# Altium PCB PCB1.PcbDoc
Units mm, origin at the board's own origin, x right, y up, seen from the top; angles counter-clockwise.
Board outline 94.23 x 99.72 mm, 2 copper layers (Top Layer, Bottom Layer); 89 components, 82 nets, 252 pads, 59 vias.
Unrouted connection lines stored in the file: 127.
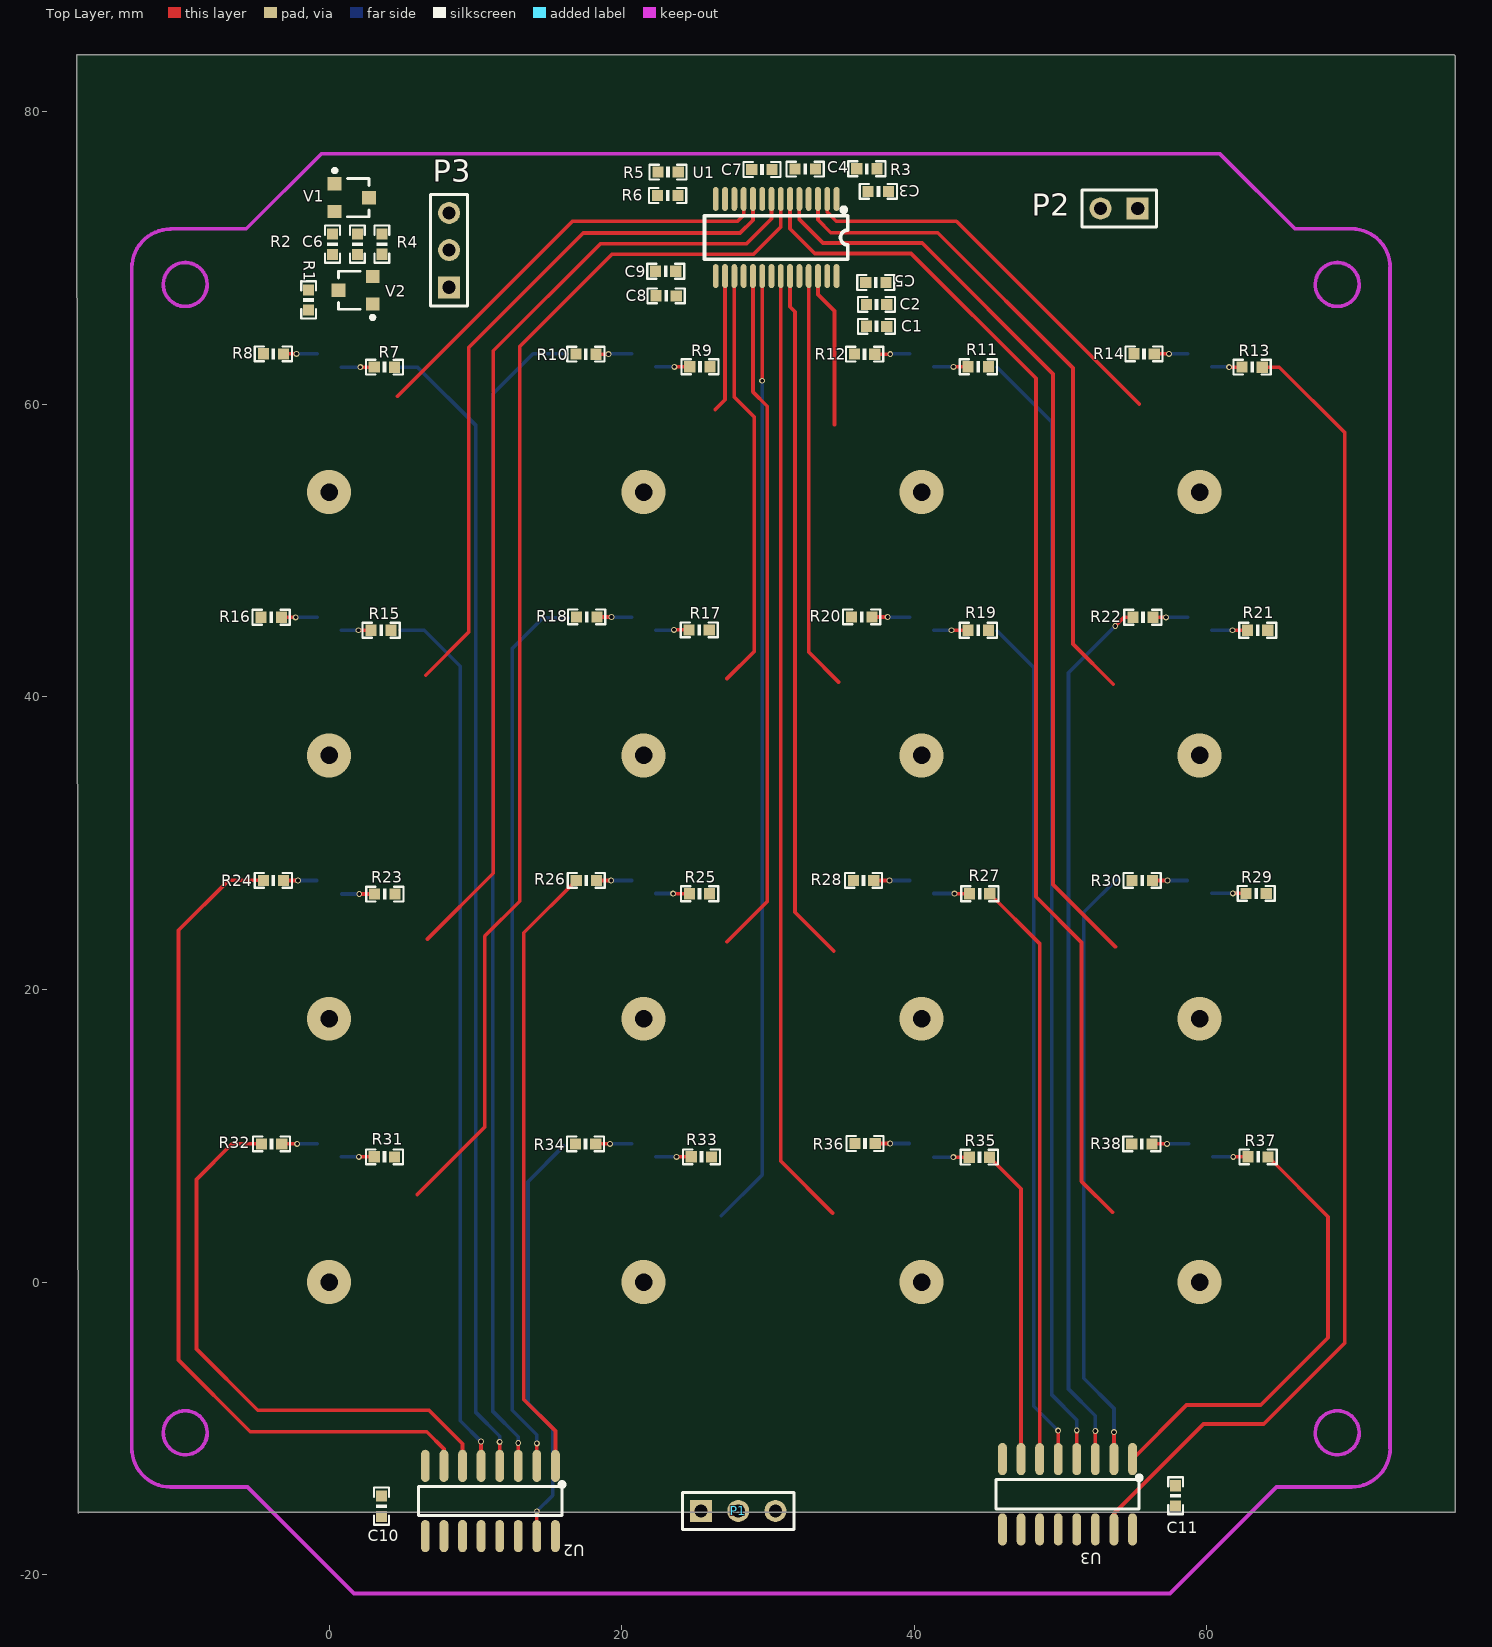
[diagram p0: Top Layer view]
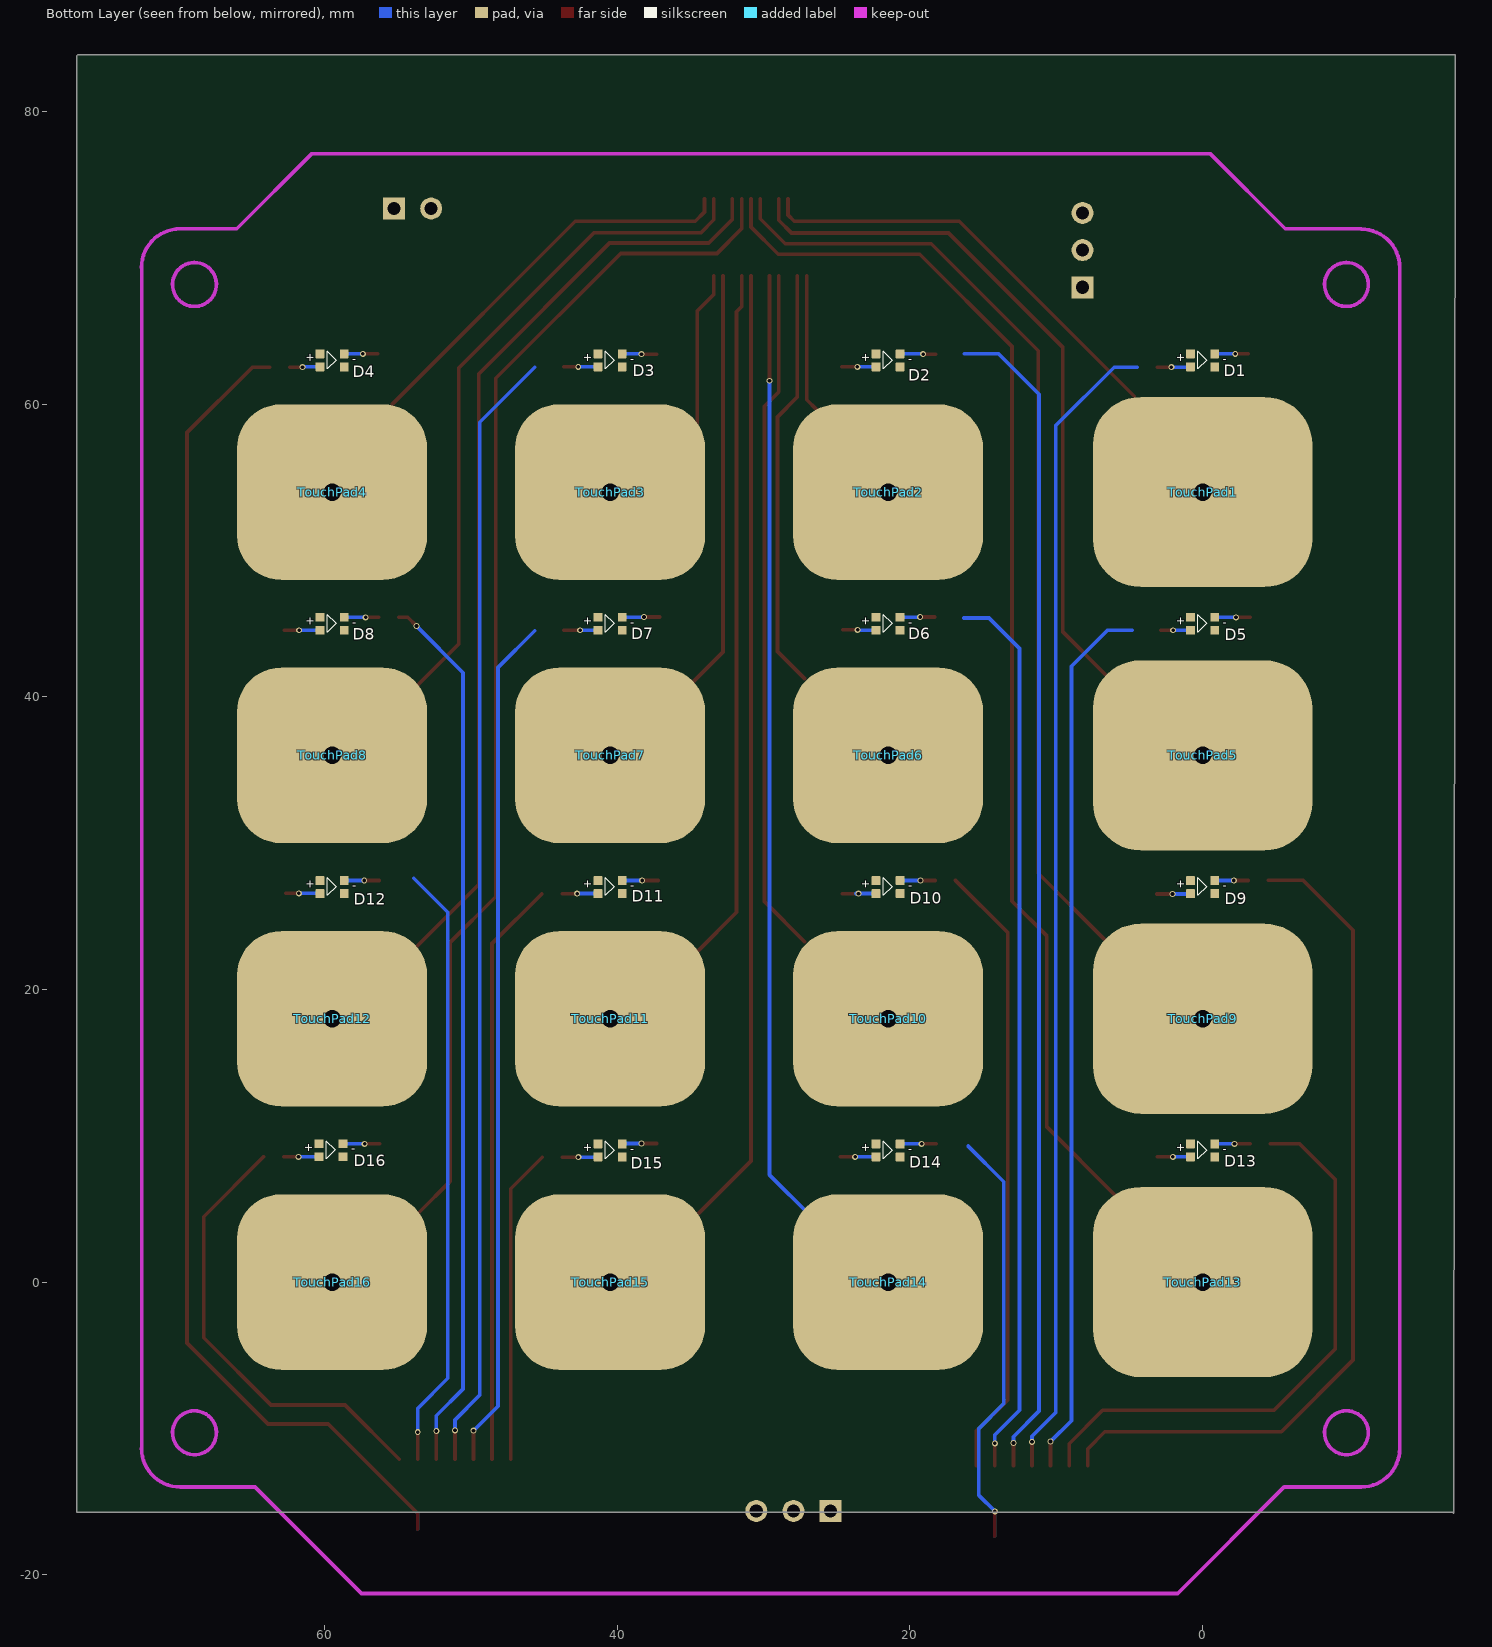
[diagram p1: Bottom Layer view, seen from below]

## Layer stack, top to bottom
Top Layer: signal copper 0.0356
Dielectric: dielectric 0.32, FR-4, Dk 4.8
Bottom Layer: signal copper 0.0356

## Board outline
-17.163,-15.815 -17.087,-15.738 76.969,-15.738 76.969,83.804 76.868,83.906 -17.265,83.906

## Design rules (kind name [scope] priority, off if disabled: settings)
Clearance [All] p1: gap=0.127
MinimumSolderMaskSliver [All] p1: minsoldermaskwidth=0
PolygonConnect [All] p1: connectstyle=Relief reliefconductorwidth=0.254 reliefentries=4 polygonreliefangle="90 Angle"
RoutingVias [All] p1: holewidth=0.711 width=1.27 viastyle="Through Hole" minholewidth=0.711 minwidth=1.27 maxholewidth=0.711 maxwidth=1.27
SilkToSilkClearance [All] p1: silktosilkclearance=0
SilkscreenOverComponentPads [IsPad] p1: minsilkscreentomaskgap=0
SolderMaskExpansion [All] p1: expansion=0.102
Width [All] p1: maxlimit=1.27 minlimit=0.254 preferedwidth=0.254
25 further rules are at their usual default settings.

## Components (designator, comment, footprint, x,y, rotation, side; value= is the part's Value field where it differs from the comment)
C1 "102" 0603p 37.414,65.329 r0 top
C2 "104" 0603p 37.414,66.827 r0 top
C3 "15pF" 0603p 37.541,74.549 r180 top
C4 "15pF" 0603p 32.537,76.073 r0 top
C5 "22pF" 0603p 37.363,68.326 r0 top
C6 "1u" 0603p 1.932,70.942 r270 top
C7 "22pF" 0603p 29.591,76.048 r180 top
C8 "22pF" 0603p 23.038,67.412 r180 top
C9 "15pF" 0603p 23.012,69.088 r180 top
C10 "104" 0603p 3.581,-15.316 r270 top
C11 "104" 0603p 57.861,-14.605 r270 top
D1 "2xLED" LED 0,63 r90 bottom
D2 "2xLED" LED 21.5,63 r90 bottom
D3 "2xLED" LED 40.5,63 r90 bottom
D4 "2xLED" LED 59.5,63 r90 bottom
D5 "2xLED" LED 0,45 r90 bottom
D6 "2xLED" LED 21.5,45 r90 bottom
D7 "2xLED" LED 40.5,45 r90 bottom
D8 "2xLED" LED 59.5,45 r90 bottom
D9 "2xLED" LED 0,27 r90 bottom
D10 "2xLED" LED 21.5,27 r90 bottom
D11 "2xLED" LED 40.5,27 r90 bottom
D12 "2xLED" LED 59.5,27 r90 bottom
D13 "2xLED" LED 0,9 r90 bottom
D14 "2xLED" LED 21.5,9 r90 bottom
D15 "2xLED" LED 40.5,9 r90 bottom
D16 "2xLED" LED 59.576,9.017 r90 bottom
P1 "Header 3" HDR1X3 25.425,-15.646 r0 top
P2 "Header 2" HDR1X2 55.27,73.381 r180 top
P3 "Header 3" HDR1X3 8.204,67.996 r90 top
R1 "10k" 0603p -1.397,67.132 r270 top
R2 "470R" 0603p 0.23,70.942 r270 top
R3 "1M" 0603p 36.754,76.098 r0 top
R4 "470R" 0603p 3.608,70.942 r90 top
R5 "10K" 0603p 23.165,75.87 r0 top
R6 "10K" 0603p 23.139,74.27 r0 top
R7 "150R" 0603p 3.785,62.535 r180 top
R8 "150R" 0603p -3.81,63.449 r0 top
R9 "150R" 0603p 25.349,62.56 r180 top
R10 "150R" 0603p 17.551,63.424 r0 top
R11 "150R" 0603p 44.374,62.56 r180 top
R12 "150R" 0603p 36.601,63.424 r0 top
R13 "150R" 0603p 63.094,62.535 r180 top
R14 "150R" 0603p 55.702,63.449 r0 top
R15 "150R" 0603p 3.556,44.552 r180 top
R16 "150R" 0603p -3.962,45.441 r0 top
R17 "150R" 0603p 25.298,44.577 r180 top
R18 "150R" 0603p 17.602,45.466 r0 top
R19 "150R" 0603p 44.374,44.552 r180 top
R20 "150R" 0603p 36.398,45.466 r0 top
R21 "150R" 0603p 63.475,44.552 r180 top
R22 "150R" 0603p 55.626,45.441 r0 top
R23 "150R" 0603p 3.81,26.518 r180 top
R24 "150R" 0603p -3.81,27.457 r0 top
R25 "150R" 0603p 25.324,26.543 r180 top
R26 "150R" 0603p 17.577,27.457 r0 top
R27 "150R" 0603p 44.475,26.543 r180 top
R28 "150R" 0603p 36.525,27.457 r0 top
R29 "150R" 0603p 63.373,26.568 r180 top
R30 "150R" 0603p 55.575,27.457 r0 top
R31 "150R" 0603p 3.785,8.56 r180 top
R32 "150R" 0603p -3.937,9.449 r0 top
R33 "150R" 0603p 25.451,8.56 r180 top
R34 "150R" 0603p 17.526,9.449 r0 top
R35 "150R" 0603p 44.45,8.534 r180 top
R36 "150R" 0603p 36.627,9.474 r0 top
R37 "150R" 0603p 63.5,8.56 r180 top
R38 "150R" 0603p 55.55,9.449 r0 top
TouchPad1 "TouchPad" TOUCHKEYBIG 0,54 r0 top
TouchPad2 "TouchPad" TOUCHKEY 21.5,54 r0 top
TouchPad3 "TouchPad" TOUCHKEY 40.5,54 r0 top
TouchPad4 "TouchPad" TOUCHKEY 59.5,54 r0 top
TouchPad5 "TouchPad" TOUCHKEYBIG 0,36 r0 top
TouchPad6 "TouchPad" TOUCHKEY 21.5,36 r0 top
TouchPad7 "TouchPad" TOUCHKEY 40.5,36 r0 top
TouchPad8 "TouchPad" TOUCHKEY 59.5,36 r180 top
TouchPad9 "TouchPad" TOUCHKEYBIG 0,18 r0 top
TouchPad10 "TouchPad" TOUCHKEY 21.5,18 r180 top
TouchPad11 "TouchPad" TOUCHKEY 40.5,18 r0 top
TouchPad12 "TouchPad" TOUCHKEY 59.5,18 r180 top
TouchPad13 "TouchPad" TOUCHKEYBIG 0,0 r180 top
TouchPad14 "TouchPad" TOUCHKEY 21.5,0 r180 top
TouchPad15 "TouchPad" TOUCHKEY 40.5,0 r180 top
TouchPad16 "TouchPad" TOUCHKEY 59.5,0 r180 top
U1 "TTP229-L" LC-SSOP-28_150MIL 30.556,71.399 r180 top
U2 "74HC595" LC-SOP-16_150MIL 11.024,-14.961 r180 top
U3 "74HC595" LC-SOP-16_150MIL 50.47,-14.503 r180 top
V1 "8550(SOT23)" SOT-23R 1.424,74.117 r270 top
V2 "8050(SOT23)" SOT-23R 1.932,67.793 r90 top

## Footprints (in the part's own frame and the unit in brackets; to place one, negate y for a bottom-side part, rotate by r counter-clockwise, add the part's x,y. Pads: shape width x height; smd on the part's side, far side on the other; paste and mask are expansions set on the pad)
0603p [mil]
  rect 30x30 smd: 1(-27,0) 2(27.5,-0.06)
  silkscreen extent -50,-20 50,20
HDR1X2 [mm] "Connector; Header; 2 Position"
  rect 1.5x1.5 hole 0.9: 1(0,0)
  round 1.5 hole 0.9: 2(2.54,0)
  silkscreen extent -1.27,-1.27 3.81,1.27
HDR1X3 [mm] "Connector; Header; 3 Position"
  rect 1.5x1.5 hole 0.9: 1(0,0)
  round 1.5 hole 0.9: 2(2.54,0) 3(5.08,0)
  silkscreen extent -1.27,-1.27 6.35,1.27
LC-SOP-16_150MIL [mm]
  oval 0.6x2.2 smd: 1(-4.445,-2.4) 2(-3.175,-2.4) 3(-1.905,-2.4) 4(-0.635,-2.4) 5(0.635,-2.4) 6(1.905,-2.4) 7(3.175,-2.4) 8(4.445,-2.4) 9(4.445,2.4) 10(3.175,2.4) 11(1.905,2.4) 12(0.635,2.4) 13(-0.635,2.4) 14(-1.905,2.4) 15(-3.175,2.4) 16(-4.445,2.4)
  silkscreen extent -5.05,-1.27 4.9,1
LC-SSOP-28_150MIL [mm]
  oval 0.4x1.63 smd mask+0.051: 1(-4.127,-2.635) 2(-3.492,-2.635) 3(-2.857,-2.635) 4(-2.222,-2.635) 5(-1.587,-2.635) 6(-0.952,-2.635) 7(-0.317,-2.635) 8(0.318,-2.635) 9(0.953,-2.635) 10(1.588,-2.635) 11(2.223,-2.635) 12(2.858,-2.635) 13(3.493,-2.635) 14(4.128,-2.635) 15(4.128,2.635) 16(3.493,2.635) 17(2.858,2.635) 18(2.223,2.635) 19(1.588,2.635) 20(0.953,2.635) 21(0.318,2.635) 22(-0.317,2.635) 23(-0.952,2.635) 24(-1.587,2.635) 25(-2.222,2.635) 26(-2.857,2.635) 27(-3.492,2.635) 28(-4.127,2.635)
  silkscreen extent -4.9,-2.05 4.9,1.48
LED [mm]
  rrect10% 0.6x0.6 smd: 1(0.445,0.826) 2(-0.444,0.826) 3(0.444,-0.826) 4(-0.445,-0.826)
  silkscreen extent -0.57,-0.28 0.62,0.32
SOT-23R [mm]
  rect 0.9x0.95 smd: 1(0.95,-1.048) 2(-0.95,-1.048) 3(0,1.302)
  silkscreen extent -1.98,-1.17 1.3,1.3
TOUCHKEY [mm]
  rrect50% 13x12 smd far side: 1(0,0)
TOUCHKEYBIG [mm]
  rrect50% 15x13 smd far side: 1(0,0)

## Part data
C1 C2 C6 C10 C11: library part 电容-NPO-0603, "0603/NPO"
C3 C4 C5 C7 C8 C9: library part Cap, "Capacitor"
P1 P3: "Header, 3-Pin"
P2: "Header, 2-Pin"
R1 R2 R3 R4 R7 R8 R9 R10 R11 R12 R13 R14 R15 R16 R17 R18 R19 R20 R21 R22 R23 R24 R25 R26 R27 R28 R29 R30 R31 R32 R33 R34 R35 R36 R37 R38: library part 电阻-0603, "0603/0.1000w/75v"
R5 R6: library part Res2, "Resistor"
U2 U3: library part 74HCT595

## Via types
v1: diameter 0.406, hole 0.254, Top Layer to Bottom Layer, 43 vias
v2: diameter 3, hole 1.2, Top Layer to Bottom Layer, 16 vias

## Nets (pads, with @x,y where several pads share a name; then routed paths per layer and width w, separated by ;. In a path a pad name is that pad's centre, name@x,y a point inside that pad or via, vN(x,y) a via of type N, cw(c..) or ccw(c..) an arc to the next point about the centre after c; other vN are vias at no path point)
595_CLK: P1.3 U2.11 U3.11
595_DAT: P1.1 U2.14
595_ST: P1.2 U2.12 U3.12
+3.3: C1.1 C2.1 C10.1 C11.1 D1.1 D2.1 D3.1 D4.1 D5.1 D6.1 D7.1 D8.1 D9.1 D10.1 D11.1 D12.1 D13.1 D14.1 D15.1 D16.1 P2.1 R1.2 R5.1 R6.1 U1.27 U2.10 U2.16 U3.10 U3.16 V1.2
GND: C1.2 C2.2 C3.1 C4.1 C5.2 C6.2 C7.1 C8.2 C9.2 C10.2 C11.2 D1.4 D2.4 D3.4 D4.4 D5.4 D6.4 D7.4 D8.4 D9.4 D10.4 D11.4 D12.4 D13.4 D14.4 D15.4 D16.4 P2.2 R3.2 U1.21 U1.28 U2.8 U2.13 U3.8 U3.13 V2.2
KYSEL: R3.1 TouchPad8.1 U1.3 | length 45.8
  Top Layer w0.254: U1.3 33.414,72.606 34.29,71.73 41.605,71.73 50.851,62.484 50.851,43.612 53.594,40.869
  other v2: 59.5,36
LED1_G: D1.3 R8.2 | length 2.3
  Top Layer w0.254: R8.2 v1(-2.234,63.448)
  Bottom Layer w0.254: v1(-2.234,63.448) D1.3@-0.829,63.448
LED1_R: D1.2 R7.2 | length 2.2
  Top Layer w0.254: v1(2.135,62.536) R7.2
  Bottom Layer w0.254: D1.2@0.845,62.536 v1(2.135,62.536)
LED2_G: D2.3 R10.2 | length 2.4
  Top Layer w0.254: R10.2 v1(19.102,63.422)
  Bottom Layer w0.254: v1@19.125,63.445 D2.3
LED2_R: D2.2 R9.2 | length 2.3
  Top Layer w0.254: v1(23.598,62.562) R9.2
  Bottom Layer w0.254: D2.2 v1@23.592,62.556
LED3_G: D3.3 R12.2 | length 2.4
  Top Layer w0.254: R12.2 v1(38.356,63.422)
  Bottom Layer w0.254: v1@38.378,63.445 D3.3
LED3_R: D3.2 R11.2 | length 2.3
  Top Layer w0.254: v1(42.674,62.562) R11.2
  Bottom Layer w0.254: D3.2 v1@42.667,62.556
LED4_G: D4.3 R14.2 | length 2.3
  Top Layer w0.254: R14.2 v1(57.402,63.448)
  Bottom Layer w0.254: v1@57.405,63.445 D4.3
LED4_R: D4.2 R13.2 | length 2.1
  Top Layer w0.254: v1(61.52,62.536) R13.2
  Bottom Layer w0.254: D4.2 v1@61.501,62.556
LED5_G: D5.3 R16.2 | length 2.4
  Top Layer w0.254: R16.2 v1(-2.284,45.439)
  Bottom Layer w0.254: v1(-2.284,45.439) D5.3@-0.831,45.439
LED5_R: D5.2 R15.2 | length 2
  Top Layer w0.254: v1(2.008,44.553) R15.2
  Bottom Layer w0.254: D5.2@0.828,44.553 v1(2.008,44.553)
LED6_G: D6.3 R18.2 | length 2.4
  Top Layer w0.254: R18.2 v1(19.306,45.464)
  Bottom Layer w0.254: v1@19.326,45.444 D6.3
LED6_R: D6.2 R17.2 | length 2.3
  Top Layer w0.254: v1(23.573,44.579) R17.2
  Bottom Layer w0.254: D6.2 v1@23.55,44.555
LED7_G: D7.3 R20.2 | length 2.6
  Top Layer w0.254: R20.2 v1(38.178,45.464)
  Bottom Layer w0.254: v1@38.198,45.444 D7.3
LED7_R: D7.2 R19.2 | length 2.3
  Top Layer w0.254: v1(42.543,44.553) R19.2
  Bottom Layer w0.254: D7.2 v1@42.541,44.555
LED8_G: D8.3 R22.2 | length 2.3
  Top Layer w0.254: R22.2 v1(57.202,45.439)
  Bottom Layer w0.254: v1@57.208,45.444 D8.3
LED8_R: D8.2 R21.2 | length 2.5
  Top Layer w0.254: v1(61.749,44.553) R21.2
  Bottom Layer w0.254: D8.2@60.328,44.553 D8.2 v1@61.747,44.555
LED9_G: D9.3 R24.2 | length 2.3
  Top Layer w0.254: R24.2 v1(-2.132,27.456)
  Bottom Layer w0.254: v1(-2.132,27.456) D9.3@-0.837,27.456
LED9_R: D9.2 R23.2 | length 2.2
  Top Layer w0.254: v1(2.059,26.519) R23.2
  Bottom Layer w0.254: D9.2@0.862,26.519 v1(2.059,26.519)
LED10_G: D10.3 R26.2 | length 2.4
  Top Layer w0.254: R26.2 v1(19.28,27.456)
  Bottom Layer w0.254: v1@19.292,27.444 D10.3
LED10_R: D10.2 R25.2 | length 2.5
  Top Layer w0.254: v1(23.519,26.545) R25.2
  Bottom Layer w0.254: D10.2 v1@23.713,26.555
LED11_G: D11.3 R28.2 | length 2.4
  Top Layer w0.254: R28.2 v1(38.305,27.456)
  Bottom Layer w0.254: v1@38.316,27.444 D11.3
LED11_R: D11.2 R27.2 | length 2.4
  Top Layer w0.254: v1(42.75,26.545) R27.2
  Bottom Layer w0.254: D11.2 v1@42.739,26.555
LED12_G: D12.3 R30.2 | length 2.4
  Top Layer w0.254: R30.2 v1(57.301,27.456)
  Bottom Layer w0.254: v1(57.301,27.456) D12.3@58.663,27.456
LED12_R: D12.2 R29.2 | length 2.3
  Top Layer w0.254: v1(61.774,26.57) R29.2
  Bottom Layer w0.254: D12.2@60.34,26.57 v1(61.774,26.57)
LED13_G: D13.3 R32.2 | length 2.4
  Top Layer w0.254: R32.2 v1(-2.186,9.447)
  Bottom Layer w0.254: v1(-2.186,9.447) D13.3@-0.828,9.447
LED13_R: D13.2 R31.2 | length 2.3
  Top Layer w0.254: v1(2.034,8.561) R31.2
  Bottom Layer w0.254: D13.2@0.831,8.561 v1(2.034,8.561)
LED14_G: D14.3 R34.2 | length 2.4
  Top Layer w0.254: R34.2 v1(19.201,9.447)
  Bottom Layer w0.254: v1(19.201,9.447) D14.3@20.672,9.447
LED14_R: D14.2 R33.2 | length 2.4
  Top Layer w0.254: v1(23.747,8.561) R33.2
  Bottom Layer w0.254: D14.2@22.331,8.561 v1(23.747,8.561)
LED15_G: D15.3 R36.2 | length 2.3
  Top Layer w0.254: R36.2 v1(38.352,9.473)
  Bottom Layer w0.254: v1(38.352,9.473) D15.3@39.646,9.473
LED15_R: D15.2 R35.2 | length 2.4
  Top Layer w0.254: v1(42.67,8.536) R35.2
  Bottom Layer w0.254: D15.2@41.345,8.536 v1(42.67,8.536)
LED16_G: D16.3 R38.2 | length 2.5
  Top Layer w0.254: R38.2 v1(57.275,9.447)
  Bottom Layer w0.254: v1(57.275,9.447) D16.3@58.736,9.447
LED16_R: D16.2 R37.2 | length 2.4
  Top Layer w0.254: v1(61.8,8.561) R37.2
  Bottom Layer w0.254: D16.2@60.413,8.561 v1(61.8,8.561)
NetC3_2: C3.2 U1.1
NetC4_2: C4.2 U1.4
NetC5_1: C5.1 U1.24
NetC6_1: C6.1 R4.2 V1.3
NetC7_2: C7.2 U1.9
NetC8_1: C8.1 U1.18
NetC9_1: C9.1 U1.15
NetR2_1: R2.1 V1.1
NetR4_1: R4.1 V2.1
NetR7_1: R7.1 R8.1 U2.4 | length 79
  Top Layer w0.254: U2.4 v1(11.659,-10.922)
  Bottom Layer w0.254: 4.47,62.535 6.045,62.535 10.033,58.547 10.033,-8.915 11.659,-10.541 v1(11.659,-10.922)
NetR9_1: R9.1 R10.1 U2.3 | length 80.2
  Top Layer w0.254: U2.3 v1(12.929,-10.998)
  Bottom Layer w0.254: v1(12.929,-10.998) 12.929,-10.566 11.176,-8.814 11.176,60.681 13.945,63.449 16.281,63.449
NetR11_1: R11.1 R12.1 U3.4 | length 76.9
  Top Layer w0.254: U3.4 v1(51.105,-10.135)
  Bottom Layer w0.254: 45.644,62.535 49.403,58.776 49.403,-7.722 51.105,-9.423 v1(51.105,-10.135)
NetR13_1: R13.1 R14.1 U3.15 | length 91.4
  Top Layer w0.254: U3.15 53.645,-15.824 59.766,-9.703 63.881,-9.703 69.418,-4.166 69.418,58.064 64.948,62.535 R13.1
NetR15_1: R15.1 R16.1 U2.5 | length 60.4
  Top Layer w0.254: U2.5 v1(10.389,-10.897)
  Bottom Layer w0.254: 4.826,44.552 6.502,44.552 8.966,42.088 8.966,-9.474 v1(10.389,-10.897)
NetR17_1: R17.1 R18.1 U2.2 | length 61.2
  Top Layer w0.254: U2.2 v1(14.199,-11.024)
  Bottom Layer w0.254: v1(14.199,-11.024) 14.199,-10.439 12.522,-8.763 12.522,43.307 14.605,45.39 16.332,45.39
NetR19_1: R19.1 R20.1 U3.5 | length 58.4
  Top Layer w0.254: U3.5 v1(49.835,-10.16)
  Bottom Layer w0.254: 45.644,44.526 48.158,42.012 48.158,-8.484 v1(49.835,-10.16)
NetR21_1: R21.1 R22.1 U3.3 | length 60.5
  Top Layer w0.254: U3.3 v1(52.375,-10.185) ; v1(53.734,44.844) 54.331,45.441 R22.1
  Bottom Layer w0.254: v1(52.375,-10.185) 52.375,-9.144 50.546,-7.315 50.546,41.656 v1(53.734,44.844)
NetR23_1: R23.1 R24.1 U2.7 | length 58.4
  Top Layer w0.254: R24.1 -6.883,27.457 -10.287,24.054 -10.287,-5.334 -5.385,-10.236 6.68,-10.236 7.849,-11.405 U2.7
NetR25_1: R25.1 R26.1 U2.1 | length 42.4
  Top Layer w0.254: U2.1 15.469,-10.185 13.31,-8.026 13.31,23.876 R26.1
NetR27_1: R27.1 R28.1 U3.6 | length 40.1
  Top Layer w0.254: R27.1 48.565,23.139 U3.6
NetR29_1: R29.1 R30.1 U3.2 | length 41.5
  Top Layer w0.254: U3.2 v1(53.645,-10.262)
  Bottom Layer w0.254: v1(53.645,-10.262) 53.645,-8.636 51.587,-6.579 51.587,25.273 53.924,27.61
NetR31_1: R31.1 R32.1 U2.6 | length 39.4
  Top Layer w0.254: R32.1 -6.629,9.449 -9.068,7.01 -9.068,-4.572 -4.877,-8.763 6.833,-8.763 9.119,-11.049 U2.6
NetR33_1: R33.1 R34.1 U2.15 | length 28.8
  Top Layer w0.254: U2.15 v1(14.199,-15.672)
  Bottom Layer w0.254: v1(14.199,-15.672) 15.291,-14.58 15.291,-10.008 13.589,-8.306 13.589,6.858 16.027,9.296
NetR35_1: R35.1 R36.1 U3.7 | length 21.5
  Top Layer w0.254: R35.1 47.295,6.375 U3.7
NetR37_1: R37.1 R38.1 U3.1 | length 30.9
  Top Layer w0.254: U3.1 58.611,-8.407 63.678,-8.407 68.275,-3.81 68.275,4.47 R37.1
NetU2_9: U2.9 U3.14
SCL: P3.3 R6.2 U1.14
SDA: P3.2 R2.2 R5.2 U1.12
TP0: TouchPad16.1 U1.6 | length 82.2
  Top Layer w0.254: U1.6 31.509,71.996 33.198,70.307 39.776,70.307 48.311,61.773 48.311,26.34 51.435,23.216 51.435,6.883 53.543,4.775
  other v2: 59.5,0
TP1: TouchPad12.1 U1.5 | length 64
  Top Layer w0.254: U1.5 32.144,72.631 33.757,71.018 40.538,71.018 49.479,62.078 49.479,27.178 53.746,22.911
  other v2: 59.5,18
TP3: TouchPad4.1 U1.2 | length 27.7
  Top Layer w0.254: U1.2 34.049,73.139 34.671,72.517 42.875,72.517 55.372,60.02
  other v2: 59.5,54
TP4: TouchPad3.1 U1.26 | length 10.6
  Top Layer w0.254: U1.26 33.414,67.501 34.544,66.37 34.544,58.598
  other v2: 40.5,54
TP5: TouchPad7.1 U1.25 | length 28.6
  Top Layer w0.254: U1.25 32.779,43.066 34.823,41.021
  other v2: 40.5,36
TP6: TouchPad11.1 U1.23 | length 47.4
  Top Layer w0.254: U1.23 31.509,66.662 31.852,66.319 31.852,25.273 34.493,22.631
  other v2: 40.5,18
TP7: TouchPad15.1 U1.22 | length 65.5
  Top Layer w0.254: U1.22 30.874,8.268 34.417,4.724
  other v2: 40.5,0
TP8: TouchPad14.1 U1.20 | length 65.4
  Top Layer w0.254: v1(29.604,61.608) U1.20
  Bottom Layer w0.254: TouchPad14.1@26.81,4.534 29.604,7.328 v1(29.604,61.608)
  other v2: 21.5,0
TP9: TouchPad10.1 U1.19 | length 47
  Top Layer w0.254: 27.203,23.266 29.947,26.01 29.947,59.868 28.969,60.846 U1.19
  other v2: 21.5,18
TP10: TouchPad6.1 U1.17 | length 28.8
  Top Layer w0.254: 27.203,41.25 29.058,43.104 29.058,59.131 27.699,60.49 U1.17
  other v2: 21.5,36
TP11: TouchPad2.1 U1.16 | length 9.4
  Top Layer w0.254: 26.391,59.639 27.064,60.312 U1.16
  other v2: 21.5,54
TP12: TouchPad1.1 U1.11 | length 29.9
  Top Layer w0.254: 4.674,60.554 16.637,72.517 27.915,72.517 28.334,72.936 U1.11
  other v2: 0,54
TP13: TouchPad5.1 U1.10 | length 48.1
  Top Layer w0.254: 6.604,41.478 9.55,44.425 9.55,63.881 17.374,71.704 28.092,71.704 28.969,72.58 U1.10
  other v2: 0,36
TP14: TouchPad9.1 U1.8 | length 66.2
  Top Layer w0.254: 6.731,23.444 11.227,27.94 11.227,63.652 18.542,70.968 28.524,70.968 30.239,72.682 U1.8
  other v2: 0,18
TP15: TouchPad13.1 U1.7 | length 84
  Top Layer w0.254: 6.032,5.982 10.643,10.592 10.643,23.647 13.03,26.035 13.03,63.957 19.329,70.256 29.007,70.256 30.874,72.123 U1.7
  other v2: 0,0
TP_INT: P3.1 R1.1 V2.3
pads on no net: U1.13 U3.9

## Keep-outs
Keep-Out Layer:
  lines w0.254: -10.94,-9.287 ccw(c-9.833,-10.299) -10.939,-9.286 ; -10.94,69.199 ccw(c-9.833,68.187) -10.939,69.2 ; -10.838,71.968 ccw(c-10.838,69.326) -13.48,69.326 -13.48,48.235 -13.48,8.808 -13.48,-11.365 ccw(c-10.838,-11.365) -10.838,-14.007 -5.573,-14.007 1.705,-21.285 57.484,-21.285 64.762,-14.007 69.883,-14.007 ccw(c69.883,-11.365) 72.524,-11.365 ; -10.838,71.993 -5.657,71.993 -0.536,77.114 60.901,77.114 66.022,71.993 69.883,71.993 cw(c69.883,69.352) 72.524,69.352 ; 67.799,-9.288 ccw(c68.906,-10.3) 67.8,-9.287 ; 67.8,69.199 ccw(c68.907,68.187) 67.801,69.2 ; 72.52,-11.365 72.52,8.814 72.52,49.172 72.52,69.352

## Text inside footprints (layer, text, board x,y; h text height)
D1: Bottom Overlay "+" at 1.27,62.873 h0.56 r270; Bottom Overlay "-" at -1.651,63.254 h0.56 r180
D2: Bottom Overlay "-" at 19.849,63.254 h0.56 r180; Bottom Overlay "+" at 22.77,62.873 h0.56 r270
D3: Bottom Overlay "+" at 41.77,62.873 h0.56 r270; Bottom Overlay "-" at 38.849,63.254 h0.56 r180
D4: Bottom Overlay "-" at 57.849,63.254 h0.56 r180; Bottom Overlay "+" at 60.77,62.873 h0.56 r270
D5: Bottom Overlay "+" at 1.27,44.873 h0.56 r270; Bottom Overlay "-" at -1.651,45.254 h0.56 r180
D6: Bottom Overlay "-" at 19.849,45.254 h0.56 r180; Bottom Overlay "+" at 22.77,44.873 h0.56 r270
D7: Bottom Overlay "+" at 41.77,44.873 h0.56 r270; Bottom Overlay "-" at 38.849,45.254 h0.56 r180
D8: Bottom Overlay "-" at 57.849,45.254 h0.56 r180; Bottom Overlay "+" at 60.77,44.873 h0.56 r270
D9: Bottom Overlay "+" at 1.27,26.873 h0.56 r270; Bottom Overlay "-" at -1.651,27.254 h0.56 r180
D10: Bottom Overlay "-" at 19.849,27.254 h0.56 r180; Bottom Overlay "+" at 22.77,26.873 h0.56 r270
D11: Bottom Overlay "+" at 41.77,26.873 h0.56 r270; Bottom Overlay "-" at 38.849,27.254 h0.56 r180
D12: Bottom Overlay "-" at 57.849,27.254 h0.56 r180; Bottom Overlay "+" at 60.77,26.873 h0.56 r270
D13: Bottom Overlay "+" at 1.27,8.873 h0.56 r270; Bottom Overlay "-" at -1.651,9.254 h0.56 r180
D14: Bottom Overlay "-" at 19.849,9.254 h0.56 r180; Bottom Overlay "+" at 22.77,8.873 h0.56 r270
D15: Bottom Overlay "+" at 41.77,8.873 h0.56 r270; Bottom Overlay "-" at 38.849,9.254 h0.56 r180
D16: Bottom Overlay "-" at 57.925,9.271 h0.56 r180; Bottom Overlay "+" at 60.846,8.89 h0.56 r270